# EAGLE board Cansat-2023-5 (EAGLE 9.4.2)
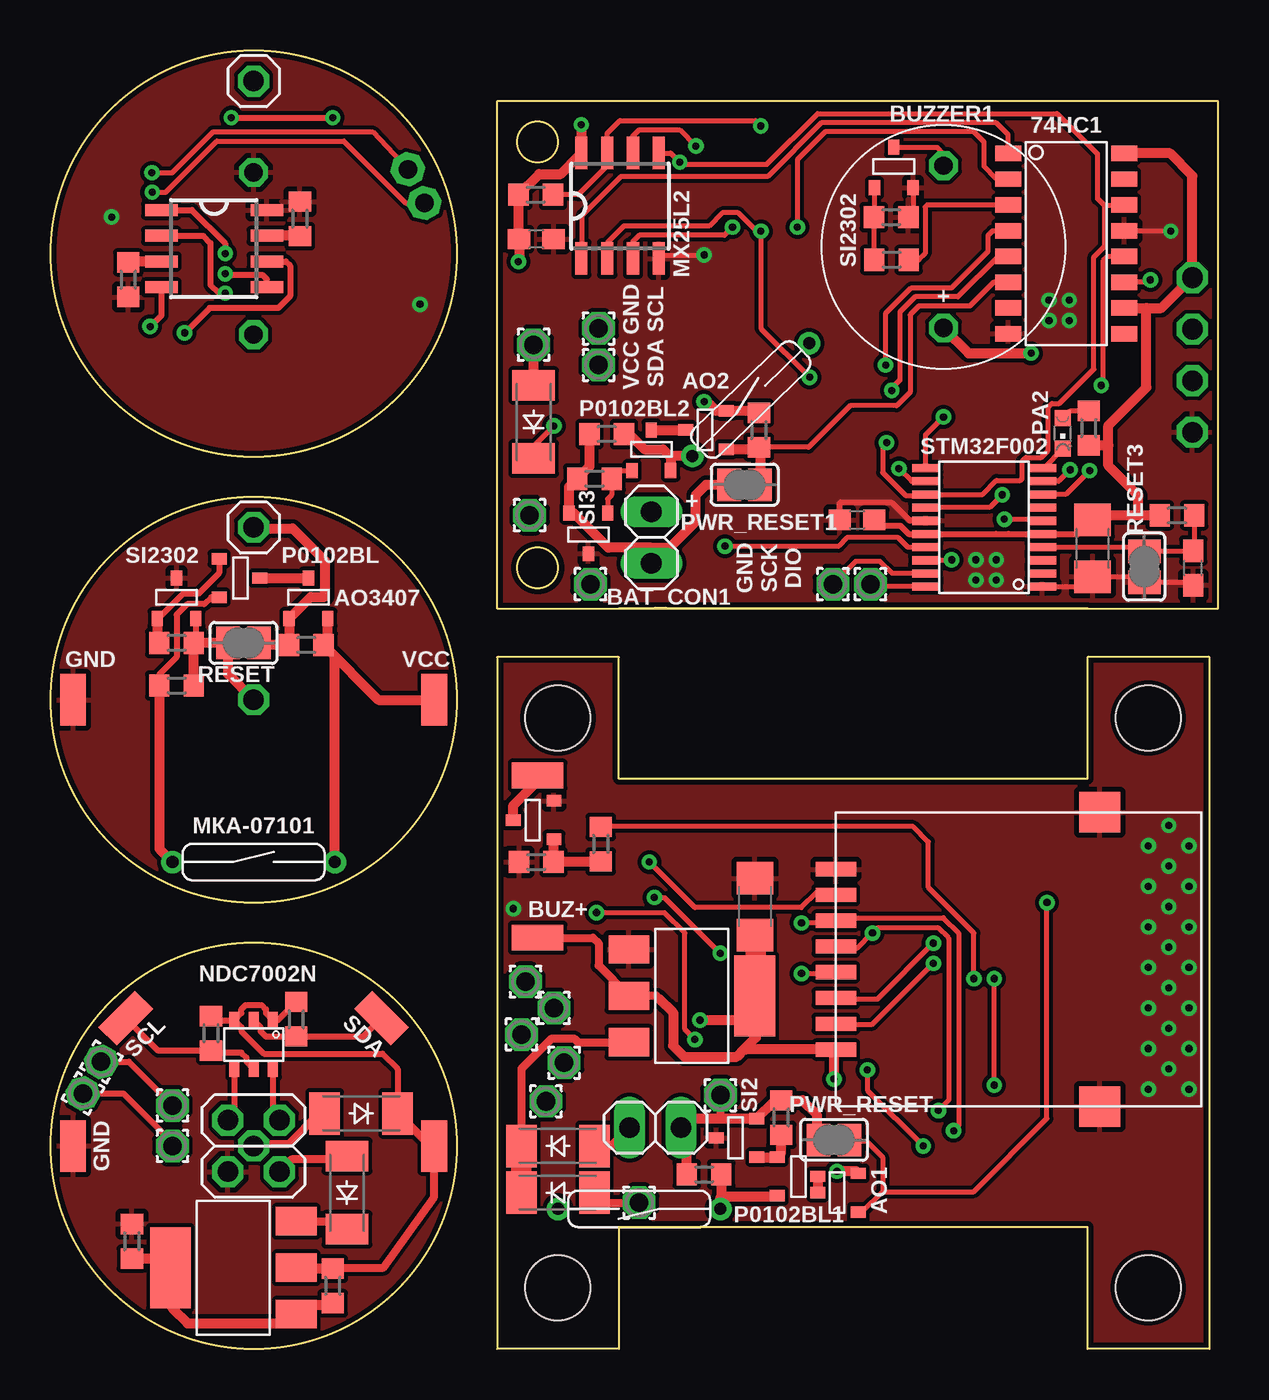
[diagram p0: board, top side]
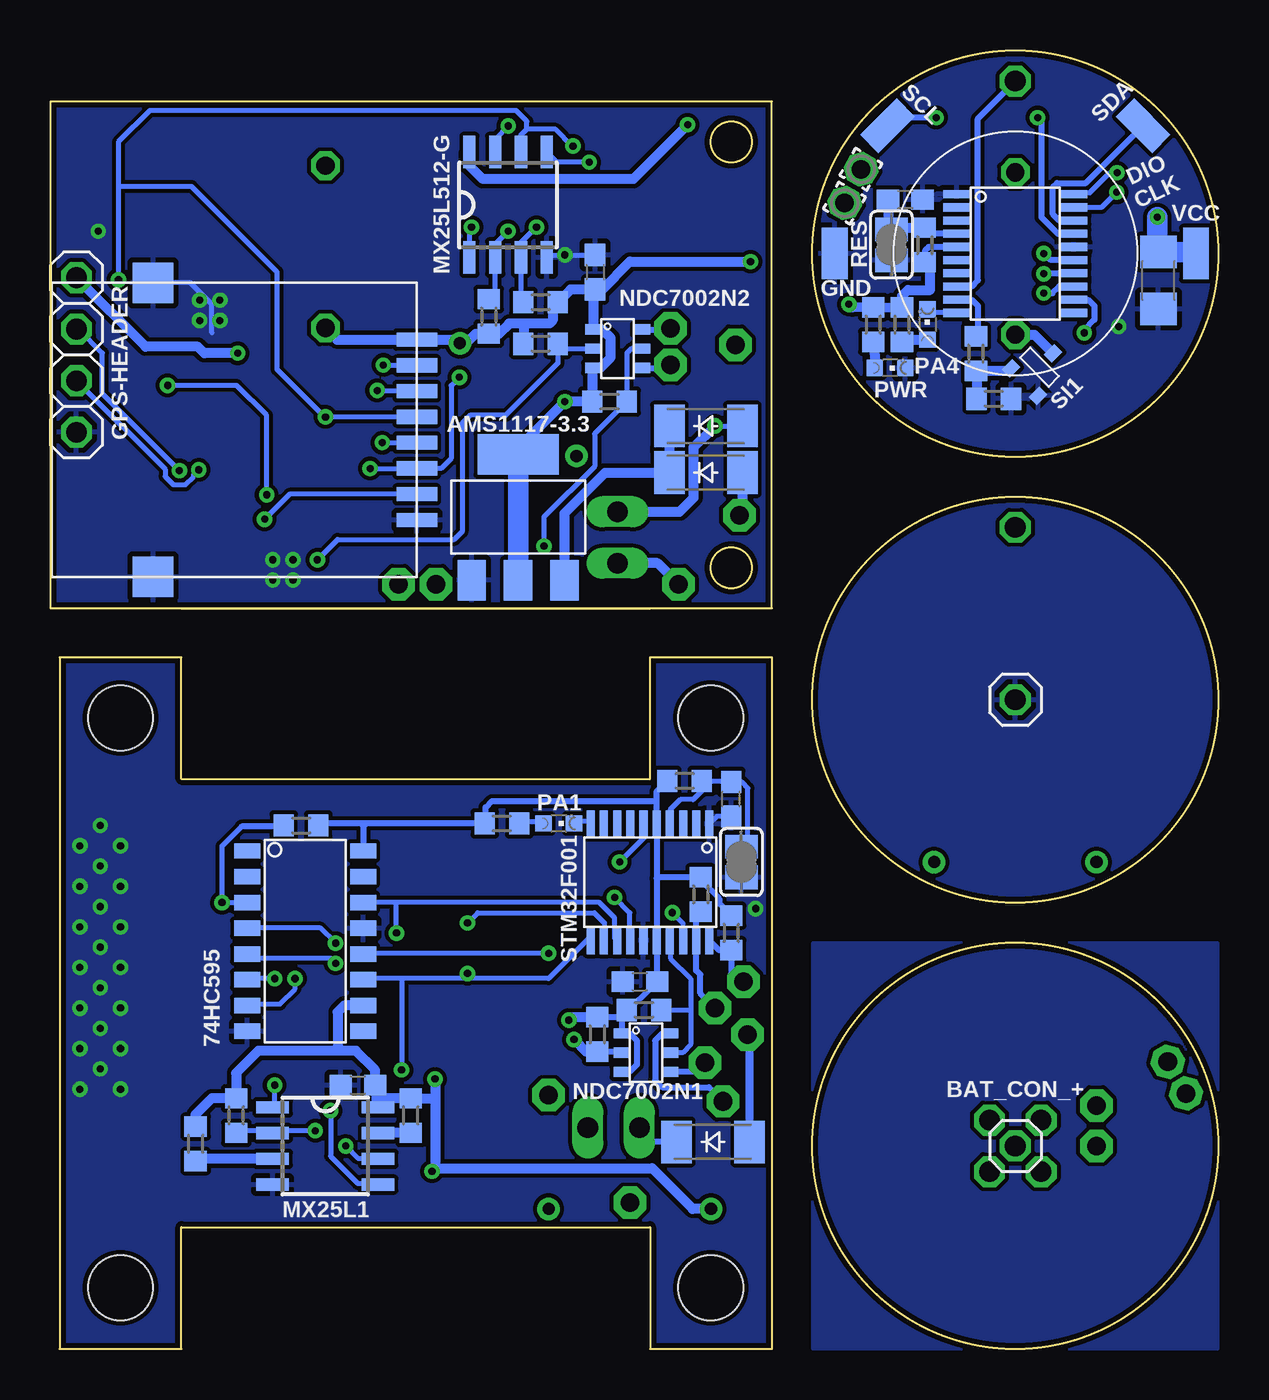
[diagram p1: board, bottom side, seen from below]

Size 57.54 x 64 mm. Coordinates in mm from the lower left corner, seen from the top.
Outline: 51.1,36.5 28,36.5
Outline: 28,34.1 22,34.1 22,0 28,0 28,6 51.1,6 51.1,0 57.1,0 57.1,34.1 51.1,34.1 51.1,28.1 28,28.1 28,34.1
Outline: 22,36.5 57.54,36.5 57.54,61.5 22,61.5 22,36.5
Outline: circle at 10,10 radius 10
Outline: circle at 10,32 radius 10
Outline: circle at 10,54 radius 10
Outline: circle at 24,38.5 radius 1
Outline: circle at 24,59.5 radius 1
Copper layers (1*16): Top 0.035mm / dielectric 1.5mm / Bottom 0.035mm
Design rules "rezonit": minimum track width 0.25mm, minimum drill 0.35mm, track to track 0.2mm, track to pad 0.2mm, pad to pad 0.15mm, via to via 0.2mm, smd to smd 0.2mm, copper to edge 0.25mm, drill to drill 0.25mm, minimum pad ring 10mil, minimum via ring 8mil, stop-mask expansion 4mil, vias tented up to drill 0mil, thermal gap 10mil
Holes 3.2 mm at 25,3 54.1,3 54.1,31.1 25,31.1

## Footprints (pad centres in the part's own frame; a part is rotated, then mirrored left to right if it is on the bottom)
SOIC16 = smd 1.27 x 0.76: 1 -2.86,4.445; 2 -2.86,3.175; 3 -2.86,1.905; 4 -2.86,0.635; 5 -2.86,-0.635; 6 -2.86,-1.905; 7 -2.86,-3.175; 8 -2.86,-4.445; 9 2.86,-4.445; 10 2.86,-3.175; 11 2.86,-1.905; 12 2.86,-0.635; 13 2.86,0.635; 14 2.86,1.905; 15 2.86,3.175; 16 2.86,4.445
SOT223 = smd 4 x 2: P$1 0,3.1 | smd 1.4 x 2: P$2 -2.29,-3.1; P$3 0,-3.1; P$4 2.29,-3.1
SOT223' = smd 1.4 x 2: 1 -2.29,-3.1; 2 0,-3.1; 3 2.29,-3.1 | smd 4 x 2: 4 0,3.1
SOT23-3 = smd 0.56 x 0.73: 1 -0.95,-1; 2 0.95,-1; 3 0,1
1X02 = drill 1.016 long: 1 -1.27,0; 2 1.27,0
1X01 = drill 1.016 octagon: 1 0,0
SMD1,27-2,54 = smd 1.27 x 2.54: 1 0,0
BUZZER = drill 0.9 octagon: + 0,-4; - 0,4
C1206 = smd 1.6 x 1.8: 1 -1.4,0; 2 1.4,0
C0603 = smd 1.1 x 1: 1 -0.85,0; 2 0.85,0
1,6/0,9 = drill 0.914 pad 1.6 octagon: 1 0,0
E01-ML01SP4 = smd 0.7 x 2: 1 -4.445,9; 2 -3.175,9; 3 -1.905,9; 4 -0.635,9; 5 0.635,9; 6 1.905,9; 7 3.175,9; 8 4.445,9 | smd 2 x 2: 9 7.25,-4; 10 -7.25,-4
1X04 = drill 1.016 octagon: 1 -3.81,0; 2 -1.27,0; 3 1.27,0; 4 3.81,0
2X02 = drill 1.016 octagon: 1 -1.27,-1.27; 2 -1.27,1.27; 3 1.27,-1.27; 4 1.27,1.27
SOP8 = smd 0.6 x 1.6: 1 -1.905,-2.6; 2 -0.635,-2.6; 3 0.635,-2.6; 4 1.905,-2.6; 5 1.905,2.6; 6 0.635,2.6; 7 -0.635,2.6; 8 -1.905,2.6
SOT-23-6 = smd 0.5 x 0.8: 1 -0.95,-1.2; 2 0,-1.2; 3 0.95,-1.2; 4 0.95,1.2; 5 0,1.2; 6 -0.95,1.2
CHIPLED_0603 = smd 0.8 x 0.8: A 0,-0.75; C 0,0.75
SJ = smd 1.168 x 1.6: 1 -0.762,0; 2 0.762,0
R0603 = smd 1 x 1.1: 1 -0.85,0; 2 0.85,0
TSSOP-20 = smd 0.4 x 1.35: 1 -2.925,-2.875; 2 -2.275,-2.875; 3 -1.625,-2.875; 4 -0.975,-2.875; 5 -0.325,-2.875; 6 0.325,-2.875; 7 0.975,-2.875; 8 1.625,-2.875; 9 2.275,-2.875; 10 2.925,-2.875; 11 2.925,2.875; 12 2.275,2.875; 13 1.625,2.875; 14 0.975,2.875; 15 0.325,2.875; 16 -0.325,2.875; 17 -0.975,2.875; 18 -1.625,2.875; 19 -2.275,2.875; 20 -2.925,2.875
SOD-123_MINI-SMA = smd 1.5 x 2.1: A 1.8,0; C -1.8,0
МКА-07101 = drill 0.6: 1 -4,0; 2 4,0

## Placement (x,y rotation side)
74HC1  74HC595SOIC16  [SOIC16]  50.05,54.49 0 top
74HC595  74HC595SOIC16  [SOIC16]  45,20.1 0 bottom
AMS1117  AMS1117  [SOT223]  31.6,17.4 270 top
AMS1117-3.3  AMS1117  [SOT223']  34.5,41 0 bottom
AMS1117-ADJ  AMS1117  [SOT223]  9,4 90 top
AO1  AO3407A  [SOT23-3]  38.8,7.7 90 top
AO2  AO3407A  [SOT23-3]  32.3,45.3 90 top
AO3407  AO3407A  [SOT23-3]  12.7,37 0 top
BAT_CON  [1X02]  29.8,10.9 0 top
BAT_CON1  [1X02]  29.6,40 270 top
BAT_CON_-  [1X01]  10,32 0 bottom
BUZ  SI2302CDS  [SOT23-3]  23.8,26.07 90 top
BUZ1  SI2302CDS  [SOT23-3]  41.55,58.24 0 top
BUZ+  [SMD1,27-2,54]  24,20.27 90 top
BUZ-  [SMD1,27-2,54]  24,28.27 90 top
BUZZER  BUZZER-5V  [BUZZER]  10,54 180 bottom
BUZZER1  BUZZER-5V  [BUZZER]  44,54.33 0 top
C1  10µF  [C1206]  34.7,21.8 270 top
C2  100nF  [C0603]  28.5,18.1 0 bottom
C3  10µF  [C1206]  2.95,52.67 90 bottom
C4  100nF  [C0603]  15.42,56.66 180 bottom
C5  100nF  [C0603]  24,27.1 90 bottom
C6  100nF  [C0603]  42.4,13 0 bottom
C7  100nF  [C0603]  23.93,54.71 180 top
C8  10µF  [C1206]  51.35,39.47 90 top
C9  100nF  [C0603]  56.31,38.5 90 top
C10  100nF  [C0603]  39.74,40.87 0 top
C11  100nF  [C0603]  30.71,53.08 270 bottom
CHRG  [1,6/0,9]  23.2,15.5 0 top
CHRG1  [1,6/0,9]  23.8,49.5 0 top
E01-ML01SP1  E01-ML01SP4  [E01-ML01SP4]  48.49,45.31 270 bottom
E01-ML01SP4  E01-ML01SP4  [E01-ML01SP4]  47.7,19.2 90 top
GND  [SMD1,27-2,54]  1.1,10 0 top
GND1  [SMD1,27-2,54]  1.1,32 0 top
GND2  [SMD1,27-2,54]  18.9,54 0 bottom
GND3  [1,6/0,9]  33,12.5 0 top
GND4  [1,6/0,9]  26.6,37.7 0 top
GPS-HEADER  [1X04]  56.27,49 270 bottom
JP1  [2X02]  10,10 90 top
JP2  [1X01]  10,10 0 bottom
JP3  [1X01]  10,62.5 0 top
MX25L1  MX25L25645  [SOP8]  44,10 270 bottom
MX25L2  MX25L25645  [SOP8]  28.06,56.35 0 top
MX25L512  MX25L25645  [SOP8]  8.05,54.24 270 top
MX25L512-G  MX25L25645  [SOP8]  35,56.4 0 bottom
NDC7002N  NDC7002N  [SOT-23-6]  10,15 180 top
NDC7002N1  NDC7002N  [SOT-23-6]  28.2,14.6 270 bottom
NDC7002N2  NDC7002N  [SOT-23-6]  29.6,49.31 270 bottom
P0102BL  P0102BL  [SOT23-3]  9.3,38 270 top
P0102BL1  P0102BL  [SOT23-3]  36.8,8.5 270 top
P0102BL2  P0102BL  [SOT23-3]  29.6,44.3 0 top
PA1  [CHIPLED_0603]  32.5,25.9 270 bottom
PA2  [CHIPLED_0603]  49.88,45.13 180 top
PA4  [CHIPLED_0603]  14.33,50.5 0 bottom
PAD1  [1,6/0,9]  2.49,14.15 330 top
PAD2  [1,6/0,9]  1.59,12.59 330 top
PWR  [CHIPLED_0603]  16.18,48.36 270 bottom
PWR-CTRL  [1X01]  10,40.5 0 top
PWR_RESET  [SJ]  38.6,10.3 180 top
PWR_RESET1  [SJ]  34.2,42.6 180 top
R1  1k  [R0603]  13.9,3.1 270 top
R2  1k4  [R0603]  4,5.3 90 top
R3  4k7  [R0603]  7.9,15.55 90 top
R4  4k7  [R0603]  12.1,16.25 90 top
R5  10k x2  [R0603]  6.2,34.8 0 top
R6  10k  [R0603]  6.2,32.7 0 top
R7  10k  [R0603]  12.6,34.7 0 top
R8  1k  [R0603]  15.58,50.5 270 bottom
R9  5k1  [R0603]  14.46,54.42 90 bottom
R10  1k*2  [R0603]  17,50.5 270 bottom
R11  5k1  [R0603]  3.82,52.71 270 top
R12  5k1  [R0603]  12.28,55.71 90 top
R13  5k1  [R0603]  23.93,24 180 top
R14  1k  [R0603]  27.11,24.88 90 top
R15  5k1  [R0603]  26.3,28 0 bottom
R16  1k  [R0603]  35.3,25.9 0 bottom
R17  5k1  [R0603]  11.06,46.84 0 bottom
R18  1k  [R0603]  11.94,49.06 90 bottom
R19  5k1  [R0603]  28.3,16.7 180 bottom
R20  5k1  [R0603]  30.6,15.5 90 bottom
R21  5k1  [R0603]  36,11.4 90 top
R22  5k1  [R0603]  32.2,8.6 180 top
R23  5k1  [R0603]  45.2,25.8 0 bottom
R24  5k1  [R0603]  39.8,11.5 90 bottom
R25  5k1  [R0603]  50.4,10.1 270 bottom
R26  5k1  [R0603]  48.4,11.5 90 bottom
R27  5k1  [R0603]  24,20.5 90 bottom
R28  5k1  [R0603]  25.5,22.4 90 bottom
R29  5k1  [R0603]  41.42,55.79 0 top
R30  1k  [R0603]  41.44,53.69 0 top
R31  5k1  [R0603]  55.51,41.09 0 top
R32  1k  [R0603]  51.16,45.4 90 top
R33  5k1  [R0603]  30,46.7 180 bottom
R34  5k1  [R0603]  33.4,49.55 180 bottom
R35  10k  [R0603]  26.8,42.9 180 top
R36  10k  [R0603]  27.4,45.1 180 top
R37  10k  [R0603]  34.9,45.3 90 top
R38  5k1  [R0603]  35.95,50.9 270 bottom
R39  5k1  [R0603]  23.9,56.9 180 top
R40  5k1  [R0603]  33.4,51.6 0 bottom
RESET  [SJ]  9.5,34.8 180 top
RESET1  [SJ]  16.1,54.43 90 bottom
RESET2  [SJ]  23.5,24 90 bottom
RESET3  [SJ]  53.9,38.56 90 top
SCL  [SMD1,27-2,54]  3.7,16.3 315 top
SCL1  [SMD1,27-2,54]  16.3,60.3 315 bottom
SCL2  [1,6/0,9]  24.4,12.2 0 top
SCL3  [1,6/0,9]  27,50.3 180 top
SDA  [SMD1,27-2,54]  16.3,16.3 45 top
SDA1  [SMD1,27-2,54]  3.7,60.3 45 bottom
SDA2  [1,6/0,9]  25.3,14.1 0 top
SDA3  [1,6/0,9]  27,48.5 180 top
SI1  SI2302CDS  [SOT23-3]  8.84,48.37 315 bottom
SI2  SI2302CDS  [SOT23-3]  33.8,10.4 90 top
SI3  SI2302CDS  [SOT23-3]  26.5,40.2 180 top
SI2302  SI2302CDS  [SOT23-3]  6.2,37 0 top
STM32F001  STM32F042F6P6  [TSSOP-20]  28,23 180 bottom
STM32F002  STM32F042F6P6  [TSSOP-20]  46,40.5 90 top
STM32F042  STM32F042F6P6  [TSSOP-20]  10,54 270 bottom
SW  [1,6/0,9]  6,12 0 top
SWC  [1,6/0,9]  17.6,58.15 330 bottom
SWC1  [1,6/0,9]  23.4,18.1 0 top
SWC2  [1,6/0,9]  40.4,37.7 180 top
SWD  [1,6/0,9]  6,10 0 top
SWD1  [1,6/0,9]  18.41,56.49 330 bottom
SWD2  [1,6/0,9]  24.8,16.8 0 top
SWD3  [1,6/0,9]  38.55,37.7 180 top
U$1  MBR0530T1G  [SOD-123_MINI-SMA]  14.6,7.7 90 top
U$2  MBR0530T1G  [SOD-123_MINI-SMA]  15.3,11.6 180 top
U$3  МКА-07101  [МКА-07101]  29,6.9 180 top
U$4  MBR0530T1G  [SOD-123_MINI-SMA]  25,10 0 top
U$5  MBR0530T1G  [SOD-123_MINI-SMA]  24.9,10.2 0 bottom
U$6  MBR0530T1G  [SOD-123_MINI-SMA]  25,7.7 0 top
U$7  МКА-07101  [МКА-07101]  34.5,46.8 44 top
U$8  MBR0530T1G  [SOD-123_MINI-SMA]  25.25,43.2 0 bottom
U$9  MBR0530T1G  [SOD-123_MINI-SMA]  23.8,45.7 90 top
U$10  MBR0530T1G  [SOD-123_MINI-SMA]  25.25,45.5 0 bottom
VCC  [SMD1,27-2,54]  18.9,10 180 top
VCC1  [SMD1,27-2,54]  18.9,32 0 top
VCC2  [SMD1,27-2,54]  1.1,54 0 bottom
VIN  [1,6/0,9]  29,7.2 0 top
VIN1  [1,6/0,9]  23.6,41.1 0 top
МКА-07101  МКА-07101  [МКА-07101]  10,24 0 top

## Library data of the parts
74HC1 74HC595 AMS1117 AMS1117-ADJ AO1 AO2 AO3407 BUZ BUZ1 BUZZER BUZZER1 E01-ML01SP1 E01-ML01SP4 SI1-SI3 SI2302 U$1 U$2 U$4-U$6 U$8-U$10 = CanCubeSat
AMS1117-3.3 P0102BL P0102BL1 P0102BL2 STM32F001 STM32F002 STM32F042 U$3 U$7 МКА-07101 = Kunosheru
BAT_CON BAT_CON1 BAT_CON_- JP1-JP3 PWR-CTRL = pinhead
BUZ+ BUZ- CHRG CHRG1 GND GND1-GND4 PAD1 PAD2 SCL SCL1-SCL3 SDA SDA1-SDA3 SW SWC SWC1 SWC2 SWD SWD1-SWD3 VCC VCC1 VCC2 VIN VIN1 = wirepad
C1-C11 = rcl; SPICEPREFIX: C
GPS-HEADER MX25L1 MX25L2 MX25L512 MX25L512-G NDC7002N NDC7002N1 NDC7002N2 = HM
PA1 PA2 PA4 PWR = led
PWR_RESET PWR_RESET1 RESET RESET1-RESET3 = jumper
R1-R40 = rcl; SPICEPREFIX: R

## Nets
BUZZER: R18.2 STM32F042.9
BUZZER1: 74HC595.7 R14.2
BUZZER2: 74HC1.3 R30.2
CS: MX25L512.1 STM32F042.15
GND: GND.1 JP1.2 R2.2
GND1: GND1.1 SI2302.3
GND2: C3.1 C4.1 GND2.1 MX25L512.4 PWR.C R17.2 RESET1.1 SI1.2 STM32F042.1 STM32F042.16
GND3: 74HC595.8 74HC595.13 AMS1117.P$2 BUZ.2 C1.1 C2.1 C5.1 C6.1 E01-ML01SP4.8 E01-ML01SP4.9 E01-ML01SP4.10 MX25L1.4 R13.2 RESET2.1 SI2.3 STM32F001.1 STM32F001.15
GND4: PA1.C STM32F001.10
GND5: 74HC1.8 74HC1.13 AMS1117-3.3.1 BUZ1.2 C7.1 C8.1 C9.1 C10.1 C11.1 E01-ML01SP1.8 E01-ML01SP1.9 E01-ML01SP1.10 GPS-HEADER.4 MX25L2.4 MX25L512-G.4 R29.2 RESET3.1 SI3.3 STM32F002.1 STM32F002.15
GND6: PA2.C STM32F002.10
HLD: MX25L2.7 MX25L512-G.7 R39.1
IRQ: E01-ML01SP4.7 STM32F001.6
IRQ1: E01-ML01SP1.7 STM32F002.6
LATCH: 74HC595.12 STM32F001.14
LATCH1: 74HC1.12 STM32F002.14
MEM_CS: 74HC595.6 MX25L1.1
MEM_CS1: 74HC1.1 MX25L2.1
MEM_G_CS: 74HC1.2 MX25L512-G.1
MISO: MX25L512.2 STM32F042.13
MISO1: E01-ML01SP4.6 MX25L1.2 R26.1 STM32F001.12
MISO2: E01-ML01SP1.6 MX25L2.2 MX25L512-G.2 R38.1 STM32F002.12
MOSI: MX25L512.5 STM32F042.14
MOSI1: 74HC595.14 E01-ML01SP4.5 MX25L1.5 STM32F001.13
MOSI2: 74HC1.14 E01-ML01SP1.5 MX25L2.5 MX25L512-G.5 STM32F002.13
N$1: JP1.1 U$1.A
N$2: JP2.1 U$2.A
N$3: AMS1117-ADJ.P$1 AMS1117-ADJ.P$2 R1.2 R2.1
N$4: NDC7002N.5 R3.1 SCL.1
N$5: PAD2.1 SWD.1
N$6: NDC7002N.2 R4.1 SDA.1
N$7: P0102BL.1 R5.1 SI2302.1
N$8: P0102BL.2 R6.1 МКА-07101.1
N$9: AO3407.3 P0102BL.3
N$10: BAT_CON_-.1 R5.2 R6.2 RESET.2 SI2302.2
N$11: AO3407.1 PWR-CTRL.1 R7.1 RESET.1
N$12: PWR.A R10.2
N$13: R17.1 R18.1 SI1.1
N$14: BUZZER.- SI1.3
N$15: PA4.A R8.2
N$16: PA4.C STM32F042.10
N$17: JP3.1 STM32F042.8
N$18: MX25L512.3 R11.1
N$19: MX25L512.7 R12.1
N$20: STM32F042.20 SWC.1
N$21: STM32F042.19 SWD1.1
N$22: BUZ.1 R13.1 R14.1
N$23: BUZ-.1 BUZ.3
N$24: R27.1 STM32F001.20 SWC1.1
N$25: PA1.A R16.2
N$26: P0102BL1.1 R21.1 SI2.1
N$27: P0102BL1.2 R22.1 U$3.1
N$28: AO1.3 P0102BL1.3
N$29: BAT_CON.2 GND3.1 PWR_RESET.2 R21.2 R22.2 SI2.2
N$30: MX25L1.7 R24.1
N$31: MX25L1.3 R25.2
N$32: BAT_CON.1 U$4.A U$5.C
N$33: U$6.A VIN.1
N$34: CHRG.1 U$5.A
N$35: R28.1 STM32F001.19 SWD2.1
N$36: NDC7002N1.6 SCL2.1
N$37: BUZ1.1 R29.1 R30.1
N$38: BUZ1.3 BUZZER1.-
N$39: PA2.A R32.2
N$40: P0102BL2.1 R35.1 SI3.1
N$41: P0102BL2.2 R36.1 U$7.1
N$42: AO2.3 P0102BL2.3
N$43: BAT_CON1.2 GND4.1 PWR_RESET1.2 R35.2 R36.2 SI3.2
N$44: U$8.A VIN1.1
N$45: CHRG1.1 U$9.A
N$46: BAT_CON1.1 U$9.C U$10.A
N$47: STM32F002.20 SWC2.1
N$48: STM32F002.19 SWD3.1
NOE: STM32F002.7
PWR_CTRL: 74HC595.3 AO1.1 PWR_RESET.1 R23.1
PWR_CTRL1: 74HC1.6 AO2.1 PWR_RESET1.1 R37.1
RESET: C4.2 R9.2 RESET1.2 STM32F042.4
RESET1: C5.2 R15.2 RESET2.2 STM32F001.4
RESET2: C9.2 R31.2 RESET3.2 STM32F002.4
RF-CS: 74HC595.4 E01-ML01SP4.3
RF_CE: 74HC595.5 E01-ML01SP4.2
RF_CE1: 74HC1.4 E01-ML01SP1.2
RF_CS: 74HC1.5 E01-ML01SP1.3
RX: GPS-HEADER.3 STM32F002.9
SCK: MX25L512.6 STM32F042.12
SCK1: 74HC595.11 E01-ML01SP4.4 MX25L1.6 STM32F001.11
SCK2: 74HC1.11 E01-ML01SP1.4 MX25L2.6 MX25L512-G.6 STM32F002.11
SCL: JP1.3 NDC7002N.6
SCL1: SCL1.1 STM32F042.17
SCL-A: NDC7002N2.6 SCL3.1
SCL-B: NDC7002N1.5 R19.1 STM32F001.17
SCL-B1: NDC7002N2.5 R33.1 STM32F002.17
SDA: JP1.4 NDC7002N.4
SDA1: SDA1.1 STM32F042.18
SDA-A: NDC7002N1.4 SDA2.1
SDA-A1: NDC7002N2.4 SDA3.1
SDA-B: NDC7002N1.2 R20.1 STM32F001.18
SDA-B1: NDC7002N2.2 R34.1 STM32F002.18
SWC: PAD1.1 SW.1
TX: GPS-HEADER.2 STM32F002.8
VCC: AMS1117-ADJ.P$3 NDC7002N.1 NDC7002N.3 R1.1 R3.2 R4.2 U$2.C VCC.1
VCC1: AO3407.2 R7.2 VCC1.1 МКА-07101.2
VCC2: BUZZER.+ C3.2 MX25L512.8 R8.1 R9.1 R10.1 R11.2 R12.2 STM32F042.5 VCC2.1
VCC3: 74HC595.10 74HC595.16 AMS1117.P$1 AMS1117.P$3 AO1.2 BUZ+.1 C1.2 C2.2 C6.2 E01-ML01SP4.1 MX25L1.8 NDC7002N1.1 NDC7002N1.3 R15.1 R16.1 R19.2 R20.2 R23.2 R24.2 R25.1 R26.2 R27.2 R28.2 STM32F001.5 STM32F001.16 U$3.2
VCC4: 74HC1.10 74HC1.16 AMS1117-3.3.2 AMS1117-3.3.4 AO2.2 BUZZER1.+ C7.2 C8.2 C10.2 C11.2 E01-ML01SP1.1 GPS-HEADER.1 MX25L2.8 MX25L512-G.8 NDC7002N2.1 NDC7002N2.3 R31.1 R32.1 R33.2 R34.2 R37.2 R38.2 R39.2 R40.2 STM32F002.5 STM32F002.16 U$7.2
VCC/1: AMS1117.P$4 U$4.C U$6.C
VCC/2: AMS1117-ADJ.P$4 U$1.C
VCC/3: AMS1117-3.3.3 U$8.C U$10.C
WP: MX25L2.3 MX25L512-G.3 R40.1

## Tracks (layer width: path | path; a pad name or v marks a point on that pad's centre or on a via)
BUZZER
  Bottom 0.3: STM32F042.9 12.15,51.73 11.85,51.42 11.85,50 R18.2
BUZZER1  (via drill 0.35)
  Top 0.25: v45.5,18.25 45.5,20.5 43.25,22.75 43.25,25 42.5,25.75 27.25,25.75 R14.2
  Bottom 0.25: v45.5,18.25 45.5,17.75 46.25,17 47.75,17 74HC595.7
BUZZER2
  Top 0.25: 74HC1.3 43.19,56.4 43.09,56.3 43.09,53.99 42.79,53.69 R30.2
CS  (via drill 0.35)
  Top 0.3: MX25L512.1 6.96,56.15 8.6,54.5 v8.6,54
  Bottom 0.3: v8.6,54 8.43,53.83 8.4,53.83 8.24,53.67 STM32F042.15
GND
  pour Top: -0.2,-0.2 -0.2,20.2 20.2,20.2 20.2,-0.2
GND1
  pour Top: -0.2,21.6 -0.2,42.3 20.2,42.3 20.2,21.6
GND2  (via drill 0.35)
  Top 0.3: MX25L512.4 5.45,50.95 v4.9,50.4
  pour Bottom: 20,44 20,64 0,64 -0.32,44
GND3  (via drill 0.35)
  Bottom 0.25: C5.1 24.7,26.25 STM32F001.1
  other vias: 56.1,22.8 56.1,24.8 56.1,18.8 56.1,20.8 54.1,22.8 54.1,24.8 54.1,18.8 54.1,20.8 55.1,15.8 55.1,17.8 55.1,13.8 56.1,14.8 56.1,16.8 56.1,12.8 54.1,14.8 54.1,16.8 54.1,12.8 55.1,23.8 55.1,25.8 55.1,19.8 55.1,21.8 22.8,21.7
  pour Top: 58,-0.5 21,-0.5 21,33.8 58,33.8
  pour Bottom: 21.7,-0.3 21.7,33.8 57.4,33.8 57.4,-0.3
GND4
  Bottom 0.25: PA1.C 31.75,26 31,26 STM32F001.10
GND5  (via drill 0.35)
  Top 0.25: BUZ1.2 42.5,56.02 R29.2 | STM32F002.1 50.85,37.58 C8.1 53.63,38.07 RESET3.1 56.16,37.8 C9.1 | MX25L2.4 30.14,53.93 v32.2,53.93 | 74HC1.13 55.17,55.12 v55.2,55.1
  Top 0.3: STM32F002.15 42.34,40.83 41.45,41.72 38.89,41.72 C10.1
  Bottom 0.25: MX25L512-G.4 32.97,53.93 v32.2,53.93 C11.1 | 49.6,50.1 49.6,51.5 50.66,52.56 E01-ML01SP1.10
  other vias: 45.6,38.9 45.6,37.9 46.6,38.9 46.6,37.9 49.2,51.7 49.2,50.7 50.2,51.7 50.2,50.7
  pour Top: 21.6,36.75 21.6,61.95 57.25,61.95 57.25,36.75
  pour Bottom: 21.8,61.75 57.25,61.75 57.25,36.75 21.8,36.75
GND6
  Top 0.25: PA2.C 48.93,43.43 STM32F002.10
HLD  (via drill 0.35)
  Top 0.25: v34.99,60.29 34.73,60.55 28.05,60.55 27.43,59.92 MX25L2.7 27.4,58.92 27.4,58.3 26,56.9 R39.1
  Bottom 0.25: v34.99,60.29 35.63,59.65 MX25L512-G.7
IRQ  (via drill 0.35)
  Top 0.25: v29.5,24 31.75,21.75 37,21.75 37.75,22.5 38.5,22.5 E01-ML01SP4.7
  Bottom 0.25: v29.5,24 28.25,25.25 28.25,25.75 STM32F001.6
IRQ1  (via drill 0.35)
  Top 0.25: v47,40.9 48.8,40.9 STM32F002.6
  Bottom 0.25: v47,40.9 45.77,42.13 E01-ML01SP1.7
LATCH  (via drill 0.35)
  Top 0.25: v33,19.5 30.25,22.25 v29.75,22.25
  Bottom 0.25: v33,19.5 42,19.5 74HC595.12 | v29.75,22.25 29,21.5 29,20.25 STM32F001.14
LATCH1  (via drill 0.35)
  Top 0.25: STM32F002.14 43.15,41.45 43.2,41.5 46.29,41.5 v46.9,42.1 | 74HC1.12 52.07,53.85 51.86,53.64 51.86,47.58 v51.78,47.5
  Bottom 0.25: v51.78,47.5 48.38,47.5 46.9,46.02 v46.9,42.1
MEM_CS  (via drill 0.35)
  Top 0.25: v46.5,13 v46.5,18.25
  Bottom 0.25: v46.5,18.25 47.75,18.25 74HC595.6 | v46.5,13 46.5,12 MX25L1.1
MEM_CS1
  Top 0.25: 74HC1.1 47.19,59.86 46.6,60.45 37.98,60.45 35.33,57.8 28.1,57.8 26.2,55.9 26.2,53.8 MX25L2.1
MEM_G_CS  (via drill 0.35)
  Top 0.25: 74HC1.2 47.16,57.7 46.6,57.7 46,58.3 46,59.5 45.5,60 38.17,60 36.8,58.63 v36.8,55.3
  Bottom 0.25: v36.8,55.3 36.91,55.2 MX25L512-G.1
MISO  (via drill 0.35)
  Top 0.3: v8.6,52.04 8.28,52.04 7.87,52.45 7.87,54.52 7.52,54.88 MX25L512.2
  Bottom 0.3: STM32F042.13 7.84,52.38 8.18,52.04 v8.6,52.04
MISO1  (via drill 0.35)
  Top 0.25: v37,21 38.5,21 E01-ML01SP4.6 38.75,21.25 44,21.25 44.75,20.5 44.75,11 v44.5,10.75
  Bottom 0.25: R26.1 48.25,10.75 46.75,10.75 MX25L1.2 46.5,10.75 v44.5,10.75 | v37,21 36.5,21.5 30.75,21.5 30.25,21 30.25,20.25 STM32F001.12
MISO2  (via drill 0.35)
  Top 0.25: MX25L2.2 27.43,54.52 28.25,55.35 32.45,55.35 33.1,56 33.89,56 34.79,55.1 v35,55.1 35,50.3 v37.4,47.9 | STM32F002.12 42.42,42.77 v41.8,43.4
  Bottom 0.25: R38.1 35.63,52.06 MX25L512-G.2 35.63,54.47 v35,55.1 | v41.8,43.4 E01-ML01SP1.6 | E01-ML01SP1.6 | v37.4,47.9 37.8,47.5 37.8,43.9 38.3,43.4 E01-ML01SP1.6
MOSI  (via drill 0.35)
  Top 0.3: MX25L512.5 10.65,52.73 10.43,52.95 8.64,52.95 v8.6,53
  Bottom 0.3: v8.6,53 8.57,53.02 STM32F042.14
MOSI1  (via drill 0.35)
  Top 0.25: v43.75,11.75 44.25,12.25 44.25,20.25 43.75,20.75 40.75,20.75 v40.5,20.5 39.75,19.75 38.75,19.75 E01-ML01SP4.5
  Bottom 0.25: STM32F001.13 29.75,20.25 29.75,21.25 30.5,22 40.5,22 | v43.75,11.75 43.75,9.5 42.4,8.15 41.44,8.15 MX25L1.5 | 74HC595.14 40.5,22 | v40.5,20.5 40.5,22
MOSI2  (via drill 0.35)
  Top 0.25: MX25L2.5 30.55,58.95 v31,58.5 31.1,58.4 35.29,58.4 37.79,60.9 49.6,60.9 51.6,58.9 51.6,56.7 51.95,56.35 | 51.95,56.35 51.99,56.4 74HC1.14 | v41.2,44.67 41,44.48 41,43.21 42.16,42.05 43.05,42.05 STM32F002.13 45.92,42.12 46.61,42.81 47.78,42.81 47.88,42.9 47.88,43.76 48.06,43.95 48.81,43.95 49.16,44.29 49.16,46.41 49.34,46.6 49.71,46.6 51.41,48.3 51.41,53.83 51.95,54.37 51.95,56.35
  Bottom 0.25: v31,58.5 32.59,58.5 MX25L512-G.5 | v41.2,44.67 E01-ML01SP1.5
N$1
  Top 0.4: JP1.1 11.87,9.33 14.43,9.33 U$1.A
N$2
  Top 0.4: JP2.1 10.11,10.11 11.75,10.11 13.24,11.6 U$2.A
N$3
  Top 0.5: R1.2 13.8,2.15 12.54,2.15 AMS1117-ADJ.P$2 11.64,1.25 6.75,1.25 6,2 6,3.9 AMS1117-ADJ.P$1 5.45,4.45 R2.1
N$4
  Top 0.3: SCL.1 5.3,14.7 R3.1 | NDC7002N.5 9.65,14.15 9.65,14.35 9.39,14.6 8,14.6
  Top 0.4: 8,14.6 R3.1
N$5
  Top 0.3: PAD2.1 3.59,12.59 6,10.18 SWD.1
N$6
  Top 0.3: NDC7002N.2 10.35,15.85 10.35,15.65 10.61,15.4 R4.1 15.4,15.4 SDA.1
N$7
  Top 0.3: P0102BL.1 8.3,38.25 7.26,37.22 6.52,37.22 5.3,36 SI2302.1
  Top 0.5: SI2302.1 5.25,34.9 R5.1
N$8
  Top 0.3: P0102BL.2 7.9,37.05 7.57,36.72 6.72,36.72 6.2,36.19 6.2,34.1 5.35,33.26 R6.1
  Top 0.5: R6.1 5.35,24.65 МКА-07101.1
N$9
  Top 0.5: P0102BL.3 AO3407.3
N$10
  Top 0.3: SI2302.2 7.15,34.9 R5.2
  Top 0.5: R6.2 R5.2 | 7.15,34.9 7.25,34.8 RESET.2 8.74,33.26 BAT_CON_-.1
  pour Bottom: 0,21.8 0,42 20,42 20,21.8
N$11
  Top 0.5: PWR-CTRL.1 10.05,40.45 11.93,40.45 13.53,38.85 13.53,37.1 13.5,37.08 12.82,37.08 AO3407.1 R7.1 10.36,34.7 RESET.1
N$12
  Bottom 0.5: R10.2 16.89,48.4 PWR.A
N$13
  Bottom 0.5: SI1.1 10.34,48.21 R18.1 11.91,48.18 R17.1
N$14
  Bottom 0.5: BUZZER.- 9.06,50 SI1.3
N$15
  Bottom 0.5: R8.2 15.48,49.75 PA4.A
N$16
  Bottom 0.25: STM32F042.10 14.15,51.08 PA4.C
N$17
  Bottom 0.3: STM32F042.8 12.15,52.38 11.85,52.68 11.85,60.65 JP3.1
N$18
  Top 0.5: MX25L512.3 3.87,53.6 R11.1
N$19
  Top 0.5: R12.1 12.27,54.88 MX25L512.7
N$20  (via drill 0.35)
  Top 0.25: v4.99,57.98 5.99,57.98 8,60 8.61,60 15.87,60 SWC.1
  Bottom 0.25: STM32F042.20 7.05,57 6.33,57 5.34,57.98 v4.99,57.98
N$21  (via drill 0.35)
  Top 0.25: v5,57.02 5.66,57.02 8.18,59.55 14.45,59.55 17.51,56.49 SWD1.1
  Bottom 0.25: STM32F042.19 5.75,56.27 v5,57.02
N$22
  Top 0.5: BUZ.1 24.78,25.1 R13.1 24.81,24.03 R14.1
N$23
  Top 0.5: BUZ.3 22.8,26.8 24,28 BUZ-.1
N$24
  Bottom 0.3: STM32F001.20 24.6,19.65 R27.1 24,18.5 SWC1.1
N$25
  Bottom 0.25: PA1.A 33.25,26 34.25,26 R16.2
N$26
  Top 0.5: SI2.1 P0102BL1.1 36,9.65 R21.1
N$27
  Top 0.5: P0102BL1.2 35.75,7.5 33.05,7.5 | R22.1 33.05,7.5 | U$3.1 33,7.45 33.05,7.5
N$28
  Top 0.5: P0102BL1.3 AO1.3
N$29
  Top 0.25: 35.75,12.25 R21.2 | 37.75,11 37.75,10.5 PWR_RESET.2
  Top 0.4: GND3.1 33,11.35
  Top 0.5: R22.2 31.35,10.62 BAT_CON.2 31.52,11.35 33,11.35 SI2.2 35.7,12.25 35.75,12.25 | R21.2 37.05,12.25 37.75,11.55 37.75,11
N$30
  Bottom 0.5: R24.1 41.38,10.65 MX25L1.7
N$31
  Bottom 0.5: MX25L1.3 50.28,9.37 R25.2
N$32
  Top 0.4: BAT_CON.1 27.63,10 U$4.A
  Bottom 0.3: U$5.C 27.83,10.2 BAT_CON.1
N$33
  Top 0.4: U$6.A 27.3,7.2 VIN.1
N$34
  Bottom 0.4: U$5.A 23.1,15.4 CHRG.1
N$35
  Bottom 0.3: R28.1 25.73,21.32 STM32F001.19 25.73,18.65 25.52,18.45 25.52,17.52 SWD2.1
N$36
  Bottom 0.3: NDC7002N1.6 27.39,15.55 27.75,15.2 27.75,13.26 27.39,12.9 25.1,12.9 SCL2.1
N$37
  Top 0.25: BUZ1.1 40.6,55.82 R29.1 40.57,53.71 R30.1
N$38
  Top 0.25: BUZ1.3 43.69,59.24 44,58.93 BUZZER1.-
N$39
  Top 0.25: PA2.A 50.25,46.25 R32.2
N$40
  Top 0.25: P0102BL2.1 28.05,43.3 R35.1 27.65,42.1 27.45,41.9 SI3.1
N$41
  Top 0.25: 30.55,43.97 30.6,44.02
  Top 0.5: U$7.1 30.6,44.02 | P0102BL2.2 30.55,43.97 30.19,44.34 29.28,44.34 28.52,45.1 R36.1
N$42
  Top 0.5: P0102BL2.3 AO2.3
N$43
  Top 0.5: BAT_CON1.2 29.6,39.5 | 29.6,39.5 27.48,39.5 25.78,41.2 SI3.2 25.55,42.5 R35.2 26.55,43.5 R36.2 | PWR_RESET1.2 32.3,42.6 31.8,42.1 31.8,40.79 30.51,39.5 29.6,39.5
  Bottom 0.5: GND4.1 27.63,38.73 BAT_CON1.2
N$44
  Bottom 0.5: U$8.A 23.45,41.25 VIN1.1
N$45
  Top 0.5: U$9.A CHRG1.1
N$46  (via drill 0.35)
  Top 0.25: U$9.C 23.8,44.5 v24.8,45.5
  Bottom 0.25: v24.8,45.5 U$10.A
  Bottom 0.5: v24.8,45.5 25.85,44.45 25.85,41.96 26.54,41.27 BAT_CON1.1
N$47
  Top 0.25: STM32F002.20 40.52,37.58 SWC2.1
N$48
  Top 0.25: STM32F002.19 41.47,38.23 40.87,38.83 39.67,38.83 SWD3.1
PWR_CTRL  (via drill 0.35)
  Top 0.25: 41,7.75 40,6.75 AO1.1 | 41,7.75 41,9.45 40.2,10.25 39.5,10.25 PWR_RESET.1 | 41,7.75 45.5,7.75 49.1,11.35 v49.1,22
  Bottom 0.25: 74HC595.3 48,22 v49.1,22 49.1,24.78 48.13,25.75
  Bottom 0.3: R23.1 46.1,25.75 48.13,25.75
PWR_CTRL1
  Top 0.25: 34.8,44.35 R37.1 37.35,44.45 39.4,46.5 41.69,46.5 42.35,47.16 42.35,50.98 42.79,51.41 45.3,51.41 46.47,52.59 74HC1.6
  Top 0.5: R37.1 34.96,44.39 PWR_RESET1.1 | AO2.1 34.8,44.35
RESET
  Bottom 0.3: 16.27,55.36 RESET1.2 | STM32F042.4 14.16,54.98 R9.2
  Bottom 0.5: C4.2 16.27,55.36 | RESET1.2 16.02,55.27 R9.2
RESET1
  Bottom 0.25: STM32F001.4 27.02,26.56 26.51,27.07 25.88,27.07 25.45,27.5 R15.2 24,28 C5.2 23.49,27.95 23.18,27.64 23.18,25.07
  Bottom 0.4: RESET2.2 23.48,24.76 23.18,25.07
RESET2
  Top 0.25: STM32F002.4 53.7,39.52 RESET3.2 56.28,39.32 C9.2 56.36,39.4 R31.2
RF-CS  (via drill 0.35)
  Top 0.25: v43.5,20 40.75,17.25 38.75,17.25 E01-ML01SP4.3
  Bottom 0.25: v43.5,20 44.25,20.75 47.75,20.75 74HC595.4
RF_CE  (via drill 0.35)
  Top 0.25: v43.5,19 40.5,16 38.75,16 E01-ML01SP4.2
  Bottom 0.25: v43.5,19 43.75,19.25 47.75,19.25 74HC595.5
RF_CE1  (via drill 0.35)
  Top 0.25: v41.15,48.5 41.15,51.05 42.41,52.31 44.4,52.31 46.2,54.12 46.2,54.9 46.42,55.12 74HC1.4
  Bottom 0.25: v41.15,48.5 39.51,48.5 E01-ML01SP1.2
RF_CS  (via drill 0.35)
  Top 0.25: v41.45,47.25 41.45,47.36 41.85,47.76 41.85,51.12 42.6,51.87 44.71,51.87 46.7,53.85 74HC1.5
  Bottom 0.25: v41.45,47.25 39.52,47.25 E01-ML01SP1.3
RX  (via drill 0.35)
  Top 0.25: v50.24,43.34 49.68,42.77 STM32F002.9
  Bottom 0.25: v50.24,43.34 50.5,43.09 50.5,43.01 50.91,42.6 51.49,42.6 51.9,43.01 51.9,43.36 GPS-HEADER.3
SCK  (via drill 0.35)
  Top 0.3: MX25L512.6 11.6,53.6 11.8,53.4 11.8,51.89 11.22,51.31 7.83,51.31 v6.6,50.09
  Bottom 0.3: STM32F042.12 6.41,51.73 6.1,51.42 6.1,50.73 6.6,50.23 v6.6,50.09
SCK1  (via drill 0.35)
  Top 0.25: v43,10 40.25,12.75 v40.25,13.75 | v37,18.5 38.5,18.5 E01-ML01SP4.4
  Bottom 0.25: 37,18.25 33,18.25 31,20.25 STM32F001.11 | 37,18.25 40.25,18.25 | 40.25,18.25 42,18.25 74HC595.11 | v43,10 42.4,9.4 41.43,9.4 MX25L1.6 | 40.25,18.25 v40.25,13.75 | 37,18.25 v37,18.5
SCK2  (via drill 0.35)
  Top 0.25: MX25L2.6 28.7,59.8 29,60.1 31,60.1 v31.8,59.3 | v54.2,52.7 54.09,52.59 74HC1.11 | STM32F002.11 43.12,45.07 v44,45.95
  Bottom 0.25: v31.8,59.3 31.84,59.3 32.66,60.12 34.08,60.12 | 34.08,60.12 34.08,60.52 34.6,61.05 52.66,61.05 54.2,59.51 54.2,57.3 | 54.2,57.3 v54.2,52.7 | E01-ML01SP1.4 v44,45.95 44.05,45.95 46.4,48.3 46.4,53.1 50.6,57.3 54.2,57.3 | MX25L512-G.6 34.37,59.84 34.08,60.12
SCL
  Top 0.3: NDC7002N.6 10.95,11.59 JP1.3
SCL1  (via drill 0.35)
  Top 0.3: v8.9,60.7 v13.9,60.7
  Bottom 0.3: STM32F042.17 7.9,54.98 8.7,55.77 8.7,60.7 v8.9,60.7 | v13.9,60.7 15.9,60.7 SCL1.1
SCL-A
  Bottom 0.3: NDC7002N2.6 27.04,50.26 SCL3.1
SCL-B
  Bottom 0.25: STM32F001.17 27,20 27,19.25 26,18.25 26,16.7 | 26,16.7 26,15 26.4,14.6 NDC7002N1.5 | R19.1 26,16.7
SCL-B1  (via drill 0.35)
  Top 0.25: v33.23,39.57 38.83,39.57 39.24,39.98 41.78,39.98 42.24,39.52 STM32F002.17
  Bottom 0.25: NDC7002N2.5 28.94,49.31 29.15,49.1 R33.1 30.74,45.11 30.74,43.51 33.23,41.01 v33.23,39.57
SDA
  Top 0.3: NDC7002N.4 9.05,11.59 JP1.4
SDA1
  Bottom 0.3: STM32F042.18 7.84,55.62 8.15,55.93 8.15,57.27 7.95,57.48 6.53,57.48 SDA1.1
SDA-A
  Bottom 0.3: SDA2.1 25.75,13.65 NDC7002N1.4
SDA-A1
  Bottom 0.3: NDC7002N2.4 27.14,48.36 SDA3.1
SDA-B  (via drill 0.35)
  Top 0.25: v31.75,15.25 31.25,15.75 31.25,20.5 30.25,21.5 v26.9,21.5
  Bottom 0.25: v26.9,21.5 26.4,21 26.4,20.15 STM32F001.18
  Bottom 0.3: NDC7002N1.2 29.45,14.65 R20.1
  Bottom 0.5: v31.75,15.25 31.15,14.65 R20.1
SDA-B1  (via drill 0.35)
  Top 0.25: v44.4,38.9 44.38,38.88 STM32F002.18
  Bottom 0.25: NDC7002N2.2 32.31,49.31 R34.1 32.55,48.59 35.11,46.02 36.88,46.02 37.27,45.63 37.27,40.28 37.65,39.9 43.4,39.9 v44.4,38.9
SWC
  Top 0.3: PAD1.1 3.85,14.15 SW.1
TX  (via drill 0.35)
  Top 0.25: v51.2,43.3 50.02,42.12 STM32F002.8
  Bottom 0.25: v51.2,43.3 55,47.1 55,49.1 56.17,50.27 GPS-HEADER.2
VCC
  Top 0.3: R3.2 8.1,16.2 NDC7002N.3 | NDC7002N.3 9.4,16.55 9.4,16.75 9.61,16.95 10.39,16.95 10.6,16.75 10.6,16.55 NDC7002N.1 11.2,16.2 R4.2 | NDC7002N.3 9.4,15.85 9.4,15.65 10.51,14.55 16.34,14.55 17.1,13.79 U$2.C
  Top 0.4: R1.1 13.95,4 16.4,4 18.9,7.5 VCC.1 | U$2.C 18.68,10.03 18.9,10.03
  Top 0.5: AMS1117-ADJ.P$3 12.15,3.83 12.28,3.95 R1.1 | 18.9,10.03 VCC.1
  pour Bottom: 0,0 0,20 20,20 20,0
VCC1
  Top 0.25: 18.8,32 18.9,31.9
  Top 0.3: 18.9,31.9 VCC1.1
  Top 0.5: R7.2 16.15,32 18.8,32 | R7.2 13.65,34.9 AO3407.2 | МКА-07101.2 14,34.15 R7.2
VCC2  (via drill 0.35)
  Bottom 0.3: STM32F042.5 14.28,54.33 14.46,54.14 R9.1
  Bottom 0.5: R9.1 14.2,53.31 14.2,52.2 15.3,52.2 15.58,51.92 R8.1 15.6,51.33 R10.1 18.02,51.33 v18.2,51.5
  Bottom 1: VCC2.1 1.17,54.07 C3.2 3,54.12 v3,55.8
  pour Top: 20.2,43.8 20.2,64.2 -0.2,64.2 -0.2,43.8
VCC3  (via drill 0.35)
  Top 0.25: 34.75,18 34.75,17.5 AMS1117.P$1 34.75,17.25 34.75,17 34.75,16
  Top 0.4: BUZ+.1 26.73,20.27 27,20 27,18.9 AMS1117.P$3 29.85,17.4 30,17.25
  Top 0.5: 30,17.25 30.68,16.57 30.68,14.95 31.22,14.4 33.8,14.4 34.2,14.8 | v32,16.21 34.54,16.21 34.75,16 | 34.2,14.8 34.75,15.35 34.75,17 | 34.2,14.8 34.24,14.76 E01-ML01SP4.1 38.6,14.65 v38.6,13.3 | AO1.2 39.7,8.75 v38.75,8.75
  Top 1: C1.2 34.75,20.35 34.75,18
  Bottom 0.25: 28,17.75 28,18.1 27.75,18.1 C2.2 | 29,16.75 R19.2 | 41.5,12 MX25L1.8
  Bottom 0.3: R20.2 29.5,16.35 R19.2 29.4,16.45 NDC7002N1.1 29,15.55 28.65,15.2 28.65,14.01 28.95,13.7 29.35,13.7 NDC7002N1.3 | 29,16.75 28,17.75 | 27.75,18.1 27.68,18.18 STM32F001.16 27.68,23.2 | 27.68,23.2 STM32F001.5 27.68,27 | 27.68,27 27.68,27.48 R15.1 | 27.68,27 35.8,27 36.1,26.7 36.1,25.95 R16.1 42,25.9 | 42,25.9 44.25,25.9 R23.2 | 42,25.9 42.14,25.76 74HC595.16 | R27.2 24.6,21.95 24.6,22.2 25.5,23.09 R28.2 27.62,23.25 27.68,23.2
  Bottom 0.5: 38.6,8.9 v38.6,13.3 38.6,12.35 R24.2 41.15,12.35 41.5,12 41.5,12.95 C6.2 41.55,13.75 42.5,14.7 43.4,14.7 | 38.6,8.9 v38.75,8.75 | 38.6,8.9 27.9,8.9 25.9,6.9 U$3.2 | R20.2 31.86,16.35 v32,16.21 | 74HC595.10 43.08,16.93 43.4,16.6 43.4,14.7 | 43.4,14.7 47.3,14.7 48.4,13.6 R26.2 49.6,12.35 50.4,11.55 R25.1
VCC4  (via drill 0.35)
  Top 0.25: 26.05,58.85 MX25L2.8 | 51.19,40.71 C8.2 | 48.2,49.09 v48.32,49.09
  Top 0.3: C10.2 40.89,40.57 41.89,40.57 42.28,40.17 STM32F002.16 46.59,40.17 46.6,40.17 47.2,40.17 STM32F002.5 50.66,40.17 51.19,40.71
  Top 0.5: v23.05,53.6 23.08,53.63 C7.2 23.05,54.74 R39.2 24.07,57.92 25.13,57.92 26.05,58.85 | v26.15,60.35 MX25L2.8 | v32.2,46.7 32.35,46.7 32.8,46.25 AO2.2 34.8,46.25 R37.2 | BUZZER1.+ 45.24,49.09 48.2,49.09 | 74HC1.16 55.16,58.94 56.27,57.83 GPS-HEADER.1 56.24,52.81 54.74,51.31 54,51.31 | 74HC1.10 54,51.31 | R32.1 52.12,44.55 | 52.12,44.55 52.12,43.55 53.61,42.06 53.6,42.05 53.6,41.09 | 52.12,44.55 52.12,45.52 53.99,47.4 53.99,51.31 54,51.31 | R31.1 53.6,41.09 | 53.6,41.09 51.57,41.09 C8.2
  Bottom 0.25: 30.3,50.2 30.36,50.26
  Bottom 0.5: MX25L512-G.8 36.98,58.92 36.98,58.41 36.24,57.67 28.83,57.67 v26.15,60.35 | BUZZER1.+ 43.42,49.76 E01-ML01SP1.1 37.55,49.76 U$7.2 37.07,49.58 36.6,50.05 R38.2 35.45,50.05 34.95,50.55 34.2,50.55 | R34.2 34.24,49.55 34.24,50.51 34.2,50.55 | 34.2,50.55 32.95,50.55 32.8,50.7 32.8,51.35 R40.2 31.92,52.23 C11.2 | C11.2 30.8,52.14 NDC7002N2.1 30.36,50.26 | C11.2 30.37,52.23 29,53.6 v23.05,53.6 | 30.3,50.2 29.95,49.85 29.95,48.87 30.46,48.36 NDC7002N2.3 30.85,48.31 R33.2 v32.2,46.7 34.5,44.4 AMS1117-3.3.4 | v48.32,49.09 49.97,49.09 50.29,49.4 52.86,49.4 GPS-HEADER.1
  Bottom 1: AMS1117-3.3.4 AMS1117-3.3.2
VCC/1
  Top 0.4: U$4.C 23.2,13.8 24.7,15.3 25.8,15.3 25.99,15.11 AMS1117.P$4
  Top 1: U$6.C U$4.C
VCC/2
  Top 0.4: AMS1117-ADJ.P$4 14.21,6.29 U$1.C
VCC/3
  Bottom 0.25: 32.21,38.1 AMS1117-3.3.3
  Bottom 0.5: 32.21,38.1 32.21,41.2 30.21,43.2 U$8.C U$10.C
WP  (via drill 0.35)
  Top 0.25: MX25L2.3 28.7,54.59 29,54.9 33.2,54.9 v33.6,55.3
  Bottom 0.25: R40.1 34.37,51.72 MX25L512-G.3 34.37,54.53 v33.6,55.3

## Text on the board
tNames: SI2302 | + | VCC GND / SDA SCL | + | GND / SCK / DIO | GND | VCC
bNames: SCL | SDA | DIO / CLK | VCC | RES | GND | BAT_CON_+